# EAGLE board ac-ac-conv v1.1 (EAGLE 7.3.0)
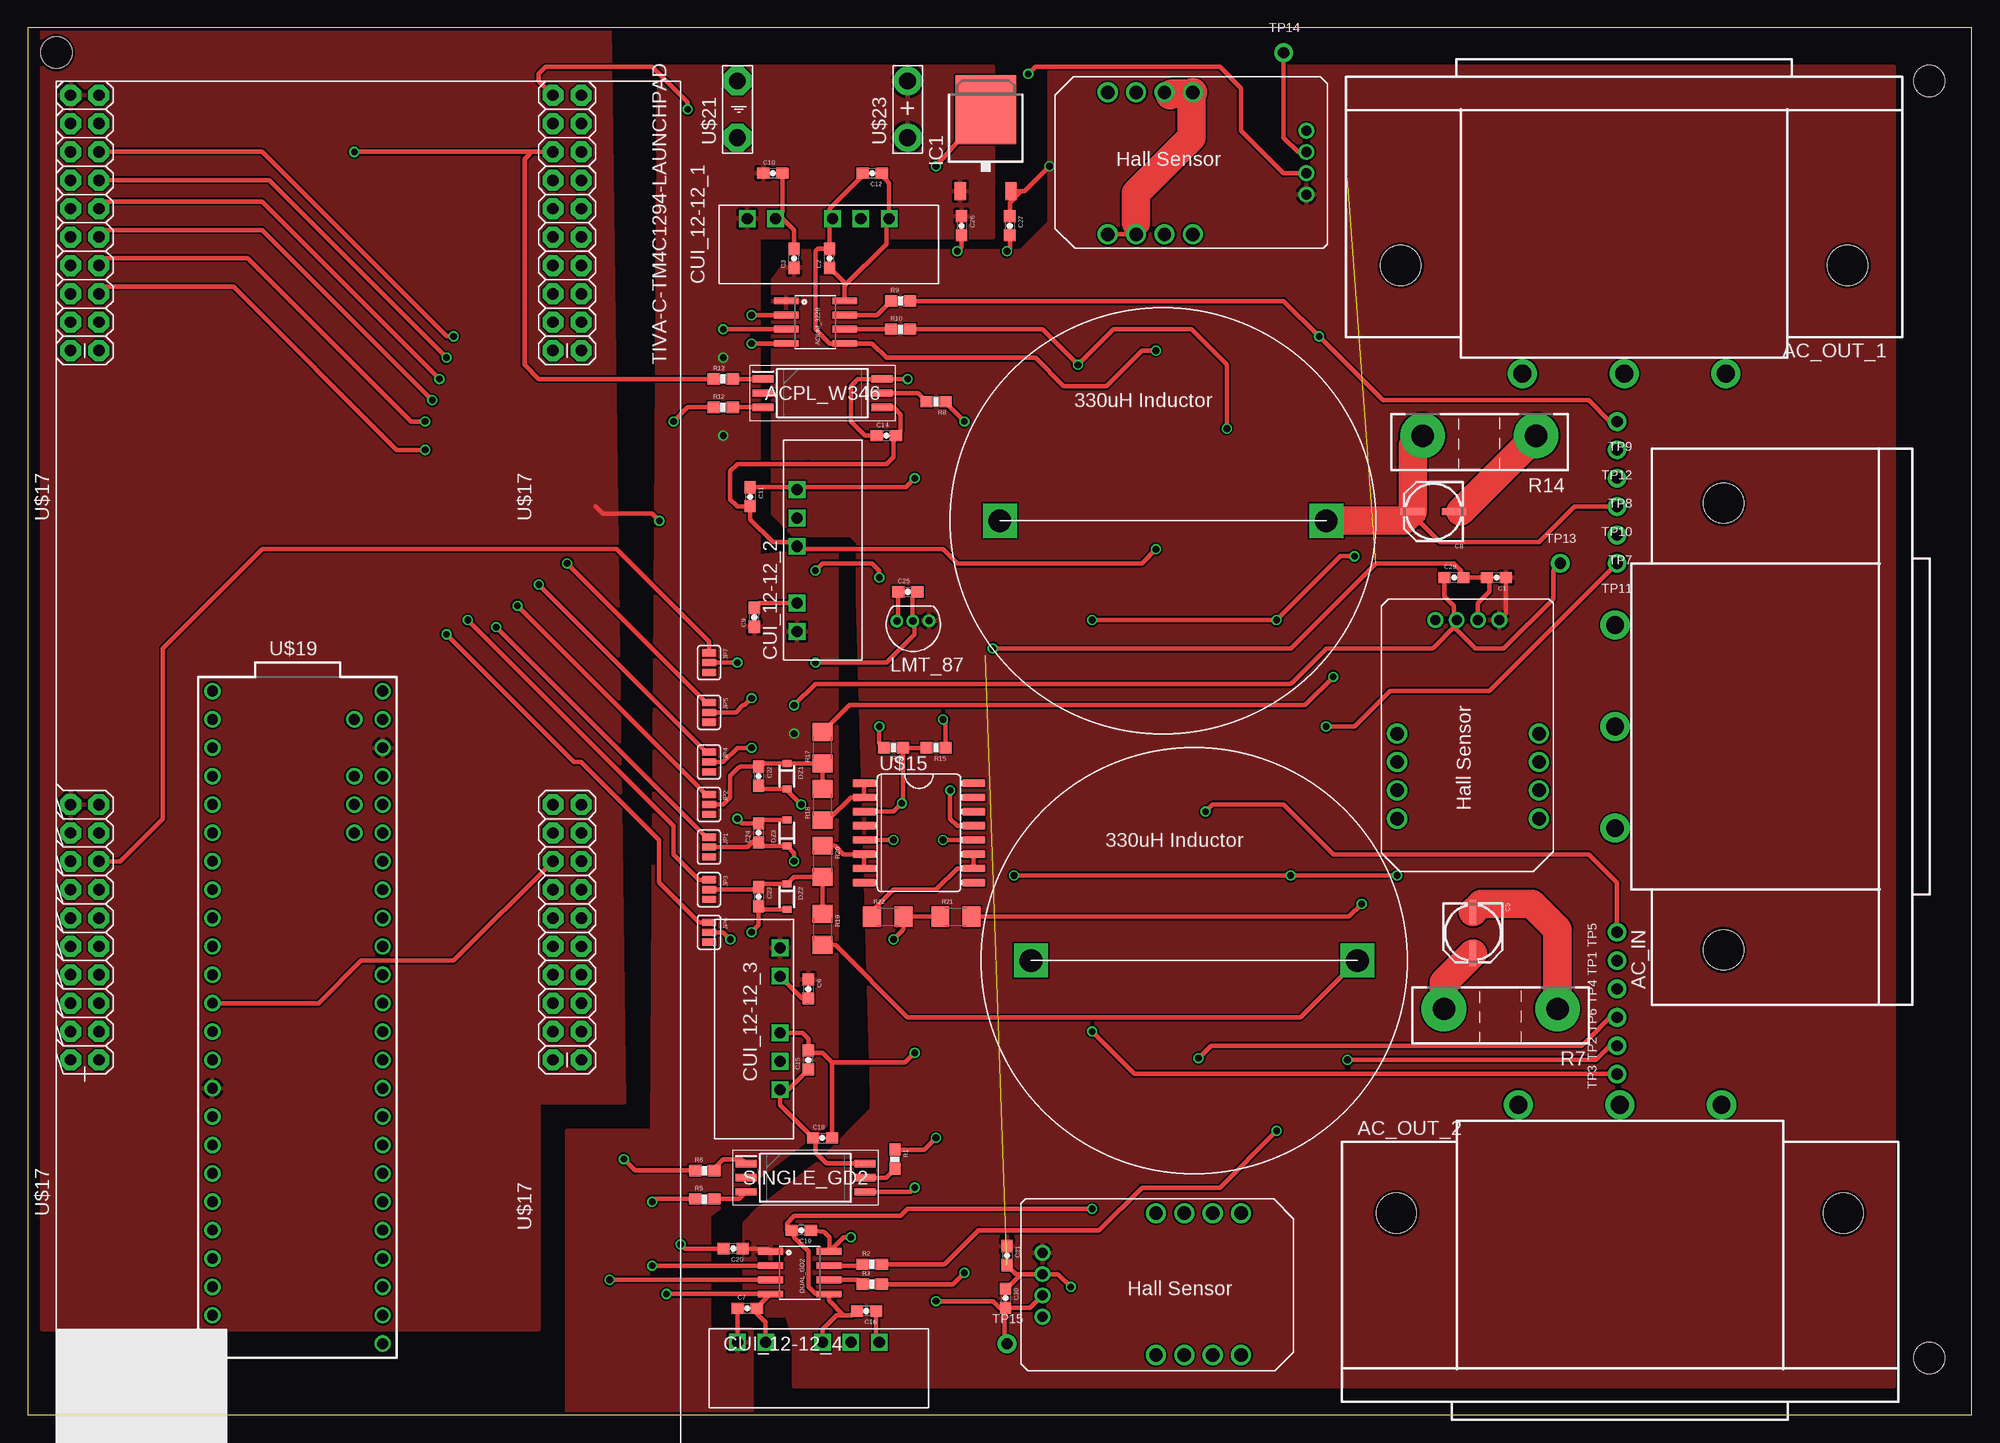
[diagram p0: board, top side]
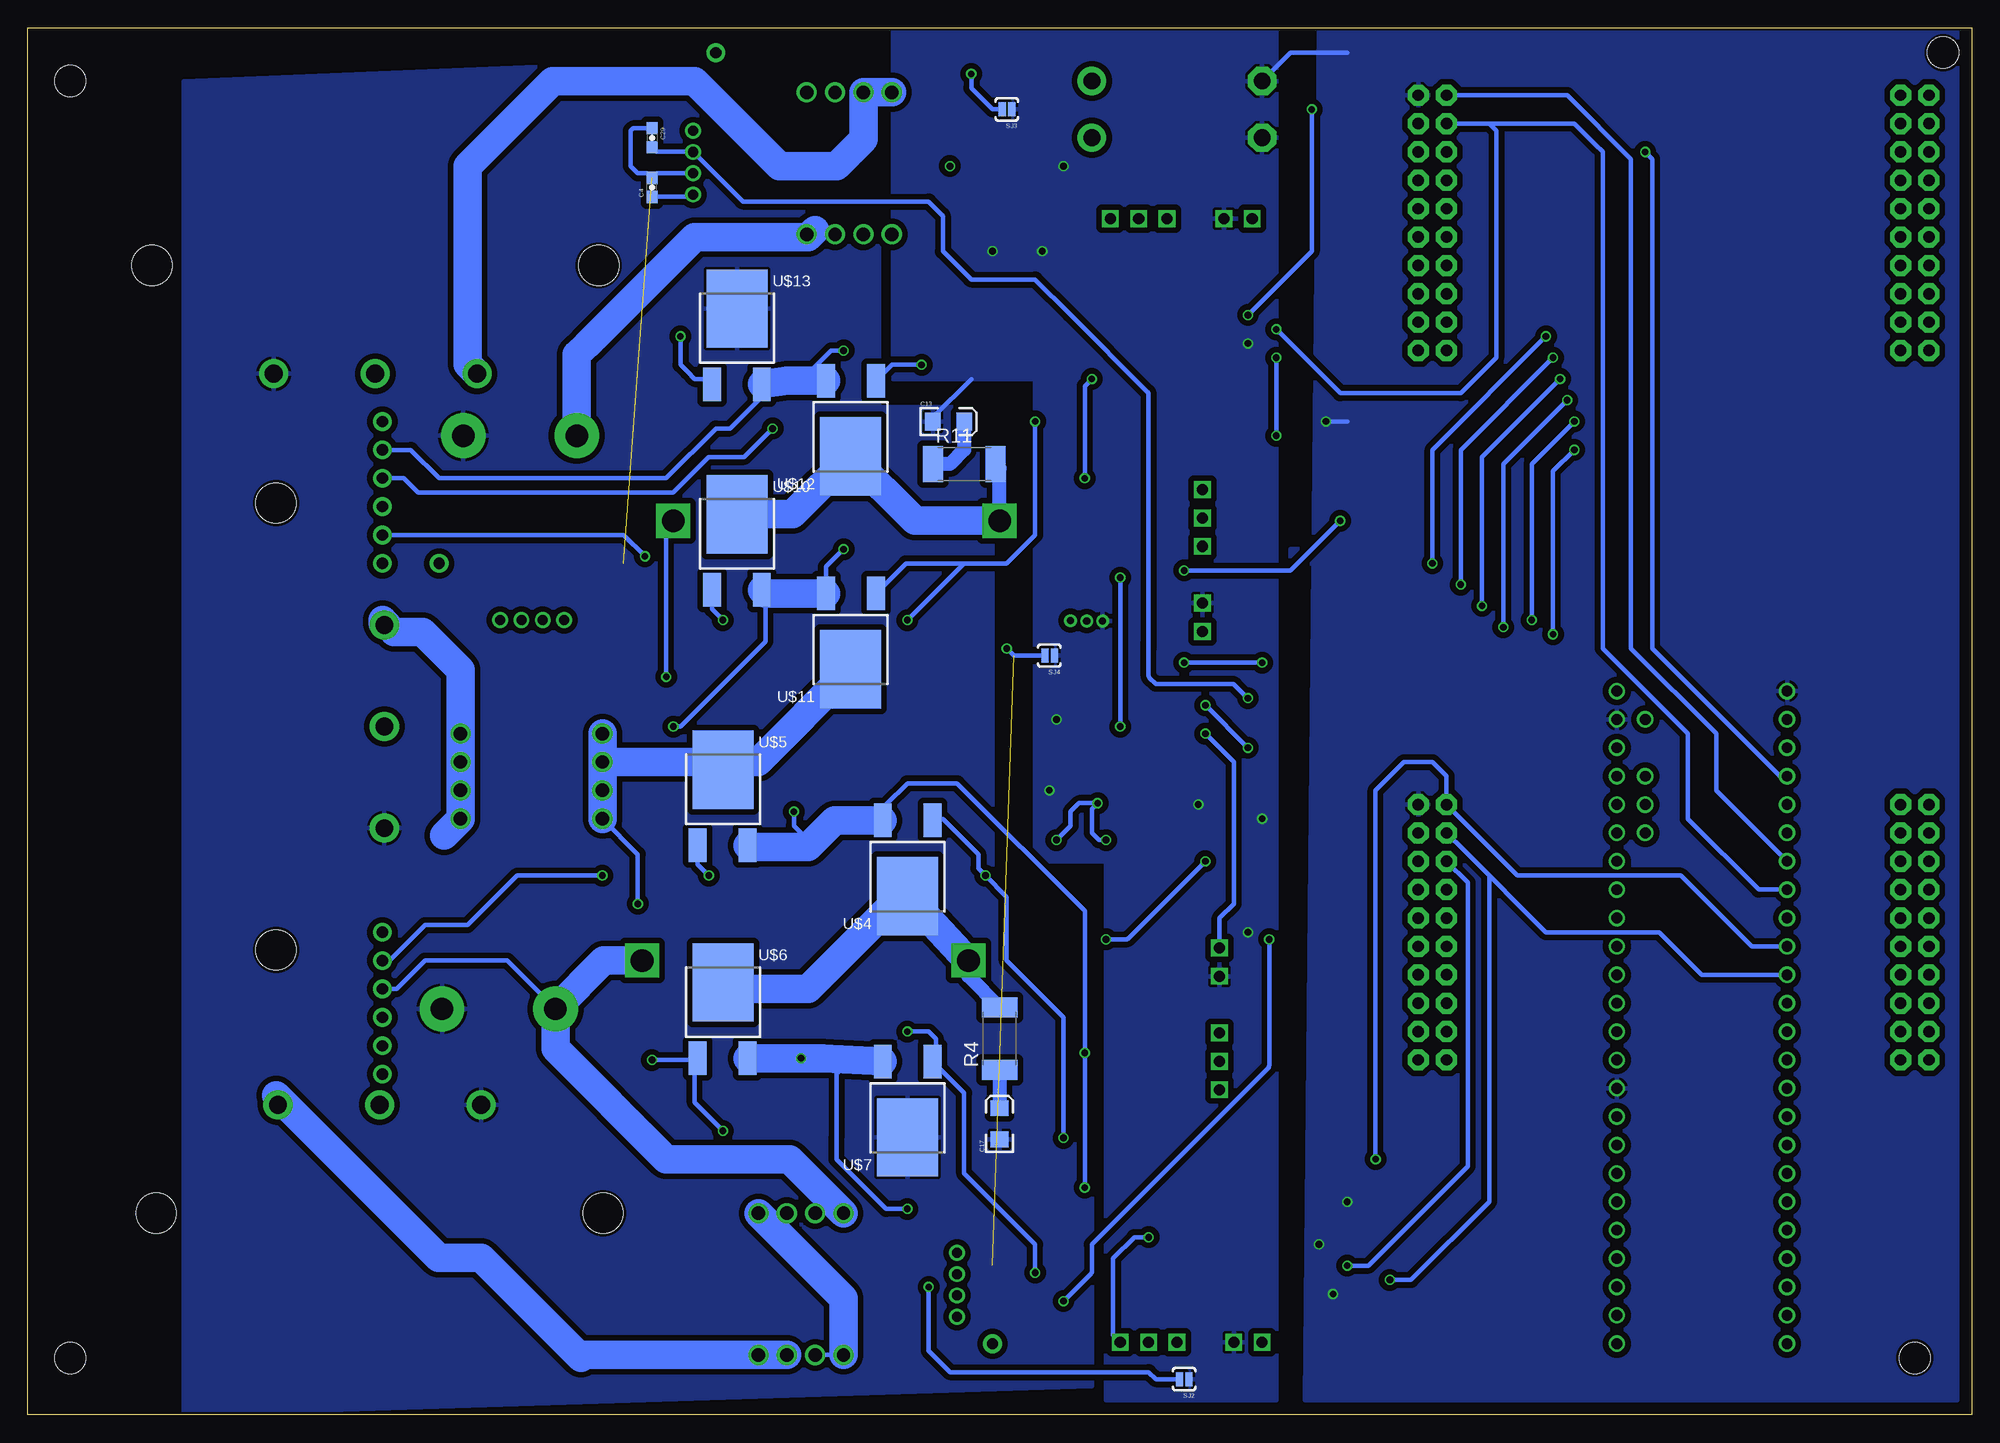
[diagram p1: board, bottom side, seen from below]

Size 173.97 x 124.13 mm. Coordinates in mm from the lower left corner, seen from the top.
Outline: 0,0 173.97,0 173.97,124.13 0,124.13 0,0
Copper layers (1*16): Top 0.035mm / dielectric 1.5mm / Bottom 0.035mm
Design rules "SeeedStudio_2layer_DRU_no_angle_20140221": minimum track width 6mil, minimum drill 12mil, track to track 6mil, track to pad 6mil, pad to pad 6mil, via to via 6mil, smd to smd 0mil, copper to edge 10mil, drill to drill 10mil, minimum pad ring 10mil, minimum via ring 6mil, stop-mask expansion 2mil, vias tented up to drill 100mil, thermal gap 10mil
Net classes: 1 Power: clearance 0.508 mm
Holes 2.8 mm at 170.18,119.38 170.18,5.08 2.54,121.92 5.08,5.08

## Footprints (pad centres in the part's own frame; a part is rotated, then mirrored left to right if it is on the bottom)
6ESRM-P = drill 1.6 pad 2.6: 1 -9.1,9.7; 2 0,9.7; 3 9.1,9.7 | hole 3.6: -20,0; 20,0
SSO-6 = smd 1.85 x 0.65: 1 -5.325,1.778; 2 -5.325,0.508; 3 -5.325,-0.762; 4 5.325,-0.762; 5 5.325,0.508; 6 5.325,1.778
SO08 = smd 0.61 x 2.21: 1 -1.905,-2.616; 2 -0.635,-2.616; 3 0.635,-2.616; 4 1.905,-2.616; 5 1.905,2.616; 6 0.635,2.616; 7 -0.635,2.616; 8 -1.905,2.616
0603-CAP = smd 1.1 x 1: 1 -0.85,0; 2 0.85,0
PANASONIC_C = smd 2.2 x 0.65: + 1.9,-0.2; - -1.8,-0.2
EIA3216 = smd 1.4 x 1.6: A 1.4,0; C -1.4,0
CUI_PDM2 = drill 0.991 square: 1 2.54,5.842; 2 5.08,5.842; 4 10.16,5.842; 5 12.7,5.842; 6 15.24,5.842
SOD-323 = smd 0.63 x 0.83: 1 -1.15,0; 2 1.15,0
F03P_THRU_HOLE = drill 0.9: GND -7.62,2.159; VCC -7.62,4.064; VOUT -7.62,0.254; VREF -7.62,-1.651 | drill 1.2: IN2 2.54,7.62; IN3 5.08,7.62; IN4 7.62,7.62; IN5 10.16,7.62; OUT6 10.16,-5.08; OUT7 7.62,-5.08; OUT8 5.08,-5.08; OUT9 2.54,-5.08
TO252 = smd 1 x 1.6: 1 -2.28,-4.8; 2 2.28,-4.8 | smd 5.4 x 6.2: 3 0,2.5
SJ_3 = smd 0.635 x 1.27: 1 -0.889,0; 2 0,0; 3 0.889,0
BOUNRS_330UH = drill 2.032 square: P$1 14.605,0; P$2 -14.605,0
LMT87_TO = drill 0.635: GND 0.305,-1.346; OUT 1.727,-1.346; VDD 3.175,-1.321
0603-RES = smd 1.1 x 1: 1 -0.85,0; 2 0.85,0
R2512 = smd 1.8 x 3.2: 1 -2.8,0; 2 2.8,0
TO-247-2V = drill 2 pad 4: 1 -5.08,0; 2 5.08,0
1206 = smd 1.6 x 1.8: 1 -1.4,0; 2 1.4,0
SJ_2S-NOTRACE = smd 0.635 x 1.27: 1 -0.45,0; 2 0.4,0
1X01_ROUND = drill 1 pad 1.676: 1 0,0
DPAK = smd 1.6 x 2.997: 1 -2.261,-4.928; 3 2.21,-4.928 | smd 5.452 x 7: 4 0,1.853
SO16L = smd 0.66 x 2.032: 1 -4.445,-4.902; 2 -3.175,-4.902; 3 -1.905,-4.902; 4 -0.635,-4.902; 5 0.635,-4.902; 6 1.905,-4.902; 7 3.175,-4.902; 8 4.445,-4.902; 9 4.445,4.902; 10 3.175,4.902; 11 1.905,4.902; 12 0.635,4.902; 13 -0.635,4.902; 14 -1.905,4.902; 15 -3.175,4.902; 16 -4.445,4.902
TIVA-C-LP-BOOSTER-PACK = drill 1.016 pad 1.88 octagon: 1 36.83,52.07; 2 36.83,54.61; 3 39.37,52.07; 4 39.37,54.61; 5 41.91,52.07; 6 41.91,54.61; 7 44.45,52.07; 8 44.45,54.61; 9 46.99,52.07; 10 46.99,54.61; 11 49.53,52.07; 12 49.53,54.61; 13 52.07,52.07; 14 52.07,54.61; 15 54.61,52.07; 16 54.61,54.61; 17 57.15,52.07; 18 57.15,54.61; 19 59.69,52.07; 20 59.69,54.61; 21 36.83,8.89; 22 36.83,11.43; 23 39.37,8.89; 24 39.37,11.43; 25 41.91,8.89; 26 41.91,11.43; 27 44.45,8.89; 28 44.45,11.43; 29 46.99,8.89; 30 46.99,11.43; 31 49.53,8.89; 32 49.53,11.43; 33 52.07,8.89; 34 52.07,11.43; 35 54.61,8.89; 36 54.61,11.43; 37 57.15,8.89; 38 57.15,11.43; 39 59.69,8.89; 40 59.69,11.43; 41 100.33,8.89; 42 100.33,11.43; 43 102.87,8.89; 44 102.87,11.43; 45 105.41,8.89; 46 105.41,11.43; 47 107.95,8.89; 48 107.95,11.43; 49 110.49,8.89; 50 110.49,11.43; 51 113.03,8.89; 52 113.03,11.43; 53 115.57,8.89; 54 115.57,11.43; 55 118.11,8.89; 56 118.11,11.43; 57 120.65,8.89; 58 120.65,11.43; 59 123.19,8.89; 60 123.19,11.43; 61 100.33,52.07; 62 100.33,54.61; 63 102.87,52.07; 64 102.87,54.61; 65 105.41,52.07; 66 105.41,54.61; 67 107.95,52.07; 68 107.95,54.61; 69 110.49,52.07; 70 110.49,54.61; 71 113.03,52.07; 72 113.03,54.61; 73 115.57,52.07; 74 115.57,54.61; 75 118.11,52.07; 76 118.11,54.61; 77 120.65,52.07; 78 120.65,54.61; 79 123.19,52.07; 80 123.19,54.61
TEENSY_3.5_DIL+4 = drill 0.965: 0 -7.62,26.67; 1 -7.62,24.13; 2 -7.62,21.59; 3 -7.62,19.05; 3.3V 7.62,24.13; 3.3V3 -7.62,-6.35; 4 -7.62,16.51; 5 -7.62,13.97; 6 -7.62,11.43; 7 -7.62,8.89; 8 -7.62,6.35; 9 -7.62,3.81; 10 -7.62,1.27; 11 -7.62,-1.27; 12 -7.62,-3.81; 13 7.62,-3.81; 14/A0 7.62,-1.27; 15/A1 7.62,1.27; 16/A2 7.62,3.81; 17/A3 7.62,6.35; 18/A4 7.62,8.89; 19/A5 7.62,11.43; 20/A6 7.62,13.97; 21/A7 7.62,16.51; 22/A8 7.62,19.05; 23/A9 7.62,21.59; 24 -7.62,-8.89; 25 -7.62,-11.43; 26 -7.62,-13.97; 27 -7.62,-16.51; 28 -7.62,-19.05; 29 -7.62,-21.59; 30 -7.62,-24.13; 31/A12 -7.62,-26.67; 32/A13 -7.62,-29.21; 33/A14 7.62,-29.21; 34/A15 7.62,-26.67; 35/A16 7.62,-24.13; 36/A17 7.62,-21.59; 37/A18 7.62,-19.05; 38/A19 7.62,-16.51; 39/A20 7.62,-13.97; A10 5.08,19.05; A11 5.08,16.51; A21 7.62,-11.43; A22 7.62,-8.89; AGND 7.62,26.67; AREF 5.08,21.59; GND -7.62,29.21; GND1 7.62,-6.35; VIN 7.62,29.21; VUSB 5.08,26.67
SPADE-GROUND = drill 1.5 pad 2.54 octagon: P$1 0,-2.54; P$2 0,2.54
SPADE-POWER = drill 1.5 pad 2.54: P$1 0,-2.54; P$2 0,2.54

## Placement (x,y rotation side)
AC_IN  6ESRM-P  [6ESRM-P]  151.76,61.59 90 top
AC_OUT_1  6ESRM-P  [6ESRM-P]  142.88,102.87 180 top
AC_OUT_2  6ESRM-P  [6ESRM-P]  142.49,18.03 0 top
ACPL_W346  ACPL-W346-SSO6  [SSO-6]  71.12,90.93 0 top
ADUM_3220  ADUM3220  [SO08]  70.48,97.79 270 top
C1  0.1u  [0603-CAP]  131.44,74.93 180 top
C2  1u  [0603-CAP]  71.75,103.5 90 top
C3  0.1u  [0603-CAP]  68.58,103.5 90 top
C4  0.1u  [0603-CAP]  118.11,109.86 90 bottom
C5  10u  [PANASONIC_C]  129.54,43.18 270 top
C6  2.2u  [0603-CAP]  69.85,38.1 270 top
C7  2.2u  [0603-CAP]  64.39,9.53 0 top
C8  10u  [PANASONIC_C]  125.86,80.64 180 top
C9  2.2u  [0603-CAP]  65.02,71.37 90 top
C10  2.2u  [0603-CAP]  66.67,111.12 0 top
C11  2.2u  [0603-CAP]  64.64,82.17 270 top
C12  2.2u  [0603-CAP]  75.56,111.12 180 top
C13  10n  [EIA3216]  91.57,88.9 0 bottom
C14  1u  [0603-CAP]  76.83,87.63 0 top
C15  2.2u  [0603-CAP]  69.85,31.75 90 top
C16  2.2u  [0603-CAP]  75.06,9.27 180 top
C17  1n  [EIA3216]  87,26.04 90 bottom
C18  1u  [0603-CAP]  71.12,24.77 0 top
C19  1u  [0603-CAP]  69.22,16.51 180 top
C20  0.1u  [0603-CAP]  63.12,14.86 180 top
C21  0.1u  [0603-CAP]  87.63,14.22 270 top
C22  0.1u  [0603-CAP]  65.41,57.15 270 top
C23  0.1u  [0603-CAP]  65.41,46.35 270 top
C24  0.1u  [0603-CAP]  65.41,52.07 90 top
C25  0.1u  [0603-CAP]  78.74,73.66 0 top
C26  0.1u  [0603-CAP]  83.57,106.43 270 top
C27  0.1u  [0603-CAP]  87.88,106.43 270 top
C28  0.1u  [0603-CAP]  127.64,74.93 0 top
C29  0.1u  [0603-CAP]  118.11,114.3 270 bottom
C30  0.1u  [0603-CAP]  87.5,10.41 270 top
CUI_12-12_1  CUI-S12-S12  [CUI_PDM2]  61.85,101.22 0 top
CUI_12-12_2  CUI-S12-S12  [CUI_PDM2]  74.68,67.56 90 top
CUI_12-12_3  CUI-S12-S12  [CUI_PDM2]  61.47,44.32 270 top
CUI_12-12_4  CUI-S12-S12  [CUI_PDM2]  60.96,0.64 0 top
DUAL_GD2  ADUM3220  [SO08]  69.09,12.7 270 top
DZ1  DIODE-ZENER-BZT52  [SOD-323]  67.94,57.15 270 top
DZ2  DIODE-ZENER-BZT52  [SOD-323]  67.94,46.35 270 top
DZ3  DIODE-ZENER-BZT52  [SOD-323]  67.94,52.07 90 top
I_SENSE_1  F03PS05  [F03P_THRU_HOLE]  127.64,63.5 270 top
I_SENSE_2  F03PS05  [F03P_THRU_HOLE]  106.81,113.28 180 top
I_SENSE_3  F03PS05  [F03P_THRU_HOLE]  98.42,10.41 0 top
IC1  7805DT  [TO252]  85.72,114.3 0 top
JP1  JUMPER-3SMD  [SJ_3]  60.96,50.8 270 top
JP2  JUMPER-3SMD  [SJ_3]  60.96,54.61 270 top
JP3  JUMPER-3SMD  [SJ_3]  60.96,46.99 270 top
JP4  JUMPER-3SMD  [SJ_3]  60.96,58.42 270 top
JP5  JUMPER-3SMD  [SJ_3]  60.96,62.87 270 top
JP6  JUMPER-3SMD  [SJ_3]  60.96,43.18 270 top
JP7  JUMPER-3SMD  [SJ_3]  60.96,67.31 270 top
L1  L330UH  [BOUNRS_330UH]  104.39,40.64 180 top
L2  L330UH  [BOUNRS_330UH]  101.6,80.01 180 top
LMT_87  LMT87_PAC  [LMT87_TO]  77.47,72.39 0 top
R1  100  [0603-RES]  77.6,22.86 270 top
R2  [0603-RES]  75.56,13.46 0 top
R3  [0603-RES]  75.56,11.68 0 top
R4  10k  [R2512]  87,33.66 90 bottom
R5  100  [0603-RES]  60.58,19.3 0 top
R6  330  [0603-RES]  60.58,21.84 0 top
R7  50  [TO-247-2V]  131.83,36.32 180 top
R8  100  [0603-RES]  81.28,90.68 180 top
R9  100  [0603-RES]  78.11,99.69 0 top
R10  100  [0603-RES]  78.11,97.16 0 top
R11  100k  [R2512]  90.17,85.09 0 bottom
R12  100  [0603-RES]  62.23,90.17 0 top
R13  330  [0603-RES]  62.23,92.71 0 top
R14  50  [TO-247-2V]  129.92,87.63 180 top
R15  10k  [0603-RES]  81.28,59.69 180 top
R16  10k  [0603-RES]  77.47,59.69 180 top
R17  100k  [1206]  71.12,59.69 90 top
R18  1.2k  [1206]  71.12,54.61 90 top
R19  100k  [1206]  71.12,43.43 270 top
R20  1.2k  [1206]  71.12,49.53 270 top
R21  100k  [1206]  83.06,44.58 0 top
R22  1.2k  [1206]  76.96,44.58 0 top
SINGLE_GD2  ACPL-W346-SSO6  [SSO-6]  69.6,20.7 0 top
SJ2  SOLDERJUMPERNC2  [SJ_2S-NOTRACE]  70.48,3.17 180 bottom
SJ3  SOLDERJUMPERNC2  [SJ_2S-NOTRACE]  86.36,116.84 180 bottom
SJ4  SOLDERJUMPERNC2  [SJ_2S-NOTRACE]  82.55,67.94 180 bottom
TP1  [1X01_ROUND]  142.24,40.64 90 top
TP2  [1X01_ROUND]  142.24,33.02 90 top
TP3  [1X01_ROUND]  142.24,30.48 90 top
TP4  [1X01_ROUND]  142.24,38.1 90 top
TP5  [1X01_ROUND]  142.24,43.18 90 top
TP6  [1X01_ROUND]  142.24,35.56 90 top
TP7  [1X01_ROUND]  142.24,78.74 180 top
TP8  [1X01_ROUND]  142.24,83.82 180 top
TP9  [1X01_ROUND]  142.24,88.9 180 top
TP10  [1X01_ROUND]  142.24,81.28 180 top
TP11  [1X01_ROUND]  142.24,76.2 180 top
TP12  [1X01_ROUND]  142.24,86.36 180 top
TP13  [1X01_ROUND]  137.16,76.2 0 top
TP14  [1X01_ROUND]  112.39,121.92 0 top
TP15  [1X01_ROUND]  87.63,6.35 0 top
U$4  IPD60R280P  [DPAK]  95.25,48.26 180 bottom
U$5  IPD60R280P  [DPAK]  111.76,55.88 0 bottom
U$6  IPD60R280P  [DPAK]  111.76,36.83 0 bottom
U$7  IPD60R280P  [DPAK]  95.25,26.67 180 bottom
U$10  IPD60R280P  [DPAK]  110.49,78.74 0 bottom
U$11  IPD60R280P  [DPAK]  100.33,68.58 180 bottom
U$12  IPD60R280P  [DPAK]  100.33,87.63 180 bottom
U$13  IPD60R280P  [DPAK]  110.49,97.16 0 bottom
U$15  LT1014  [SO16L]  79.76,52.07 270 top
U$17  TM4C1294_SHIELD  [TIVA-C-LP-BOOSTER-PACK]  58.42,-5.08 90 top
U$19  TEENSY_3.5_DIL+4  [TEENSY_3.5_DIL+4]  24.13,35.56 0 top
U$21  SPADE-GROUND  [SPADE-GROUND]  63.5,116.84 0 top
U$23  SPADE-POWER  [SPADE-POWER]  78.74,116.84 0 top

## Library data of the parts
AC_IN AC_OUT_1 AC_OUT_2 = con-tycoelectronics; MF: TYCO ELECTRONICS; MPN: 6ESRM-P; OC_FARNELL: unknown; OC_NEWARK: 87F1821
ACPL_W346 ADUM_3220 CUI_12-12_1-CUI_12-12_4 DUAL_GD2 I_SENSE_1-I_SENSE_3 L1 L2 SINGLE_GD2 U$4-U$7 U$10-U$13 U$17 = Francis-Project
C1-C30 DZ1-DZ3 JP1-JP7 R1-R3 R5 R6 R8-R10 R12 R13 R15-R22 SJ2-SJ4 = SparkFun
IC1 = linear
LMT_87 = nick
R4 R11 = SparkFun-Passives
R7 R14 = resistor-power; OC_FARNELL: unknown; OC_NEWARK: unknown
TP1-TP15 = microbuilder; BOM: EXCLUDE
U$15 = SparkFun-AnalogIC
U$19 = Teensy_3_and_LC_Series_Boards_v1.4
U$21 U$23 = Spade-terminals

## Nets
1V6: R15.2 R16.1 U$15.3 U$15.5 U$15.12
3V3: R16.2 U$17.20 U$17.80 U$19.3.3V U$19.3.3V3
5V: ADUM_3220.1 C1.1 C3.1 C4.1 C20.1 C21.1 C27.1 DUAL_GD2.1 I_SENSE_1.VCC I_SENSE_2.VCC I_SENSE_3.VCC IC1.2 LMT_87.VDD U$15.4
+12V: C6.1 C7.1 C9.1 C10.1 C26.1 CUI_12-12_1.1 CUI_12-12_2.1 CUI_12-12_3.1 CUI_12-12_4.1 IC1.1 U$23.P$1 U$23.P$2
+IN: U$15.14
-IN: U$15.15
AREF: U$19.AREF
DGND [Power]: C1.2 C4.2 C21.2 C28.2 C29.1 C30.1 I_SENSE_1.GND I_SENSE_2.GND I_SENSE_3.GND SJ2.2 SJ3.2 SJ4.2
GND [Power]: AC_IN.1 AC_OUT_1.1 AC_OUT_2.1 ADUM_3220.4 C3.2 C5.- C6.2 C7.2 C8.- C9.2 C10.2 C13.C C17.C C20.2 C22.2 C23.2 C24.2 C25.1 C26.2 C27.2 CUI_12-12_1.2 CUI_12-12_2.2 CUI_12-12_3.2 CUI_12-12_4.2 DUAL_GD2.4 DZ1.2 DZ2.2 DZ3.2 IC1.3 LMT_87.GND R5.1 R7.1 R12.1 R14.1 R15.1 SJ2.1 SJ3.1 SJ4.1 U$7.4 U$13.4 U$15.13 U$17.39 U$17.59 U$19.AGND U$19.GND U$19.GND1 U$21.P$1 U$21.P$2
HI_G1 [Power]: R8.1 TP7.1 U$10.1 U$11.1
HI_G2: R1.1 TP1.1 U$4.1 U$5.1
HI_PS1: ACPL_W346.6 C11.1 C14.1 CUI_12-12_2.6
HI_PS2: C15.1 C18.1 CUI_12-12_3.6 SINGLE_GD2.6
HI_S1: ACPL_W346.4 C11.2 C14.2 CUI_12-12_2.4 TP11.1 U$10.3 U$11.3
HI_S2 [Power]: C15.2 C18.2 CUI_12-12_3.4 SINGLE_GD2.4 TP5.1 U$4.3 U$5.3
I_APP1: C29.2 I_SENSE_2.VOUT JP5.2 TP14.1
I_APP1_TEENSY: JP5.3
I_APP1_TI: JP5.1 U$17.75
I_APP2: C30.2 I_SENSE_3.VOUT JP6.2 TP15.1
I_APP2_TEENSY: JP6.3
I_APP2_TI: JP6.1 U$17.65
I_MAIN: C28.1 I_SENSE_1.VOUT JP4.2 TP13.1
I_MAIN_TEENSY: JP4.3
I_MAIN_TI: JP4.1 U$17.73
LO_G1+: R9.2 TP9.1 U$13.1
LO_G1-: R10.2 TP8.1 U$12.1
LO_G2+: R3.2 TP3.1 U$7.1
LO_G2-: R2.2 TP2.1 U$6.1
LO_PS1: ADUM_3220.8 C2.1 C12.1 CUI_12-12_1.6
LO_PS2: C16.1 C19.1 CUI_12-12_4.6 DUAL_GD2.8
LO_S1 [Power]: ADUM_3220.5 C2.2 C12.2 CUI_12-12_1.4 TP12.1 U$12.3 U$13.3
LO_S2 [Power]: C16.2 C19.2 CUI_12-12_4.4 DUAL_GD2.5 TP6.1 U$6.3 U$7.3
N$1 [Power]: AC_IN.3 I_SENSE_1.IN2 I_SENSE_1.IN3 I_SENSE_1.IN4 I_SENSE_1.IN5
N$2 [Power]: I_SENSE_2.IN4 I_SENSE_2.IN5 I_SENSE_2.OUT8 I_SENSE_2.OUT9
N$3 [Power]: I_SENSE_3.IN4 I_SENSE_3.IN5 I_SENSE_3.OUT8 I_SENSE_3.OUT9
N$4 [Power]: AC_OUT_1.3 I_SENSE_2.OUT6 I_SENSE_2.OUT7
N$5 [Power]: L1.P$1 R4.2 U$4.4 U$6.4
N$6 [Power]: C17.A R4.1
N$7: R5.2 SINGLE_GD2.3
N$8: R6.2 SINGLE_GD2.1
N$9 [Power]: L2.P$1 R11.2 U$10.4 U$12.4
N$10 [Power]: AC_OUT_2.3 I_SENSE_3.OUT6 I_SENSE_3.OUT7
N$11 [Power]: C13.A R11.1
N$12: ACPL_W346.3 R12.2
N$13: ACPL_W346.1 R13.2
N$14 [Power]: ADUM_3220.7 R9.1
N$15: R18.1 U$15.1 U$15.2
N$16: U$19.14/A0
N$17: R22.1 U$15.10 U$15.11
N$18: U$19.15/A1
N$19: R20.1 U$15.6 U$15.7
N$20: U$19.16/A2
N$21: U$19.17/A3
N$23 [Power]: ADUM_3220.6 R10.1
N$24 [Power]: DUAL_GD2.7 R2.1
N$25: U$19.18/A4
N$26 [Power]: DUAL_GD2.6 R3.1
N$27: U$19.19/A5
N$41: U$19.20/A6
OUT: U$15.16
PWM_H1: R13.1 U$17.56 U$19.2
PWM_H2: R6.1 U$17.40 U$19.8
PWM_L1+: ADUM_3220.2 U$17.60 U$19.5
PWM_L1-: ADUM_3220.3 U$17.58 U$19.6
PWM_L2+: DUAL_GD2.3 U$17.38 U$19.9
PWM_L2-: DUAL_GD2.2 U$17.36 U$19.10
TEMP: C25.2 JP7.2 LMT_87.OUT
TEMP_TEENSY: JP7.3
TEMP_TI: JP7.1 U$17.15
V_APP1: C22.1 DZ1.1 JP2.2 R17.1 R18.2
V_APP1_TEENSY: JP2.3
V_APP1_TI: JP2.1 U$17.71
V_APP2: C23.1 DZ2.1 JP3.2 R19.1 R20.2
V_APP2_TEENSY: JP3.3
V_APP2_TI: JP3.1 U$17.67
V_MAIN: C24.1 DZ3.1 JP1.2 R21.1 R22.2
V_MAIN_TEENSY: JP1.3
V_MAIN_TI: JP1.1 U$17.69
VBUS [Power]: I_SENSE_1.OUT6 I_SENSE_1.OUT7 I_SENSE_1.OUT8 I_SENSE_1.OUT9 R21.2 U$5.4 U$11.4
VIN: U$19.VIN
VOUT1 [Power]: C8.+ I_SENSE_2.IN2 I_SENSE_2.IN3 L2.P$2 R14.2 R17.2 TP10.1
VOUT2 [Power]: C5.+ I_SENSE_3.IN2 I_SENSE_3.IN3 L1.P$2 R7.2 R19.2 TP4.1
VOUT_H1: R1.2 SINGLE_GD2.5
VOUT_H2: ACPL_W346.5 R8.2
VUSB: U$19.VUSB

## Tracks (layer width: path | path; a pad name or v marks a point on that pad's centre or on a via)
1V6  (via drill 0.6)
  Top 0.406: U$15.3 76.83,53.98 77.47,53.98 v78.23,54.73 arc45 78.32,54.96 R16.1 R15.2 | v81.92,51.44 U$15.12 | U$15.5 v77.47,51.44
  Bottom 0.406: v81.92,51.44 80.64,52.7 80.64,53.98 79.89,54.73 v78.23,54.73 78.74,54.22 78.74,52.07 78.11,51.44 v77.47,51.44
3V3  (via drill 0.6)
  Top 0.406: v76.2,61.59 76.2,60.11 R16.2 | v76.2,74.93 76.2,75.56 75.56,76.2 71.12,76.2 v70.48,75.56 | v56.52,80.01 55.88,80.64 51.44,80.64 50.8,81.28
  Bottom 0.406: v76.2,61.59 v76.2,74.93 | v70.48,75.56 60.96,75.56 v56.52,80.01
  pour Top: 1.27,124.46 52.07,124.46 53.34,27.94 45.72,27.94 45.72,7.62 1.27,7.62
5V  (via drill 0.6)
  Top 0.406: C20.1 66.22,14.86 DUAL_GD2.1 | IC1.2 88.9,109.5 | 88.9,109.5 89.18,109.5 v91.44,111.76 | C27.1 87.88,108.48 88.9,109.5 | C1.1 132.29,71.72 I_SENSE_1.VCC
  Bottom 0.406: C4.1 114.64,109 I_SENSE_2.VCC
  pour Top: 91.44,120.65 91.44,106.68 88.9,104.14 68.58,104.14 66.67,101.6 66.67,80.64 68.58,78.74 73.66,78.74 74.3,78.11 74.3,73.03 75.56,28.57 75.56,27.3 71.12,22.86 65.41,18.41 64.14,17.14 64.14,8.89 67.94,8.89 68.58,6.99 68.58,2.54 167,2.54 167,120.65
+12V  (via drill 0.6)
  Top 0.406: C7.1 63.54,6.52 CUI_12-12_4.1
  Bottom 0.406: CUI_12-12_3.1 67.31,44.45 66.04,45.72 66.04,58.42 v68.58,60.96 | v62.23,87.63 v62.23,94.61
  pour Top: 56.52,120.65 86.36,120.65 86.36,105.41 65.41,105.41 65.41,76.83 72.39,77.47 72.39,26.67 60.96,17.78 60.96,7.62 64.77,7.62 64.77,0 48.26,0 48.26,25.4 55.88,25.4
DGND  (via drill 0.6)  (2 unrouted)
  Top 0.406: 88.9,12.57 I_SENSE_3.GND 92.2,12.57 v93.34,11.43 | 88.9,12.57 88.56,12.57 arc-45 88.34,12.67 C21.2 | C30.1 arc45 87.65,11.33 88.9,12.57 | I_SENSE_2.GND 112.39,111.12 108.58,114.94 108.58,118.75 106.68,120.65 90.17,120.65 v89.53,120.02 | v86.36,68.58 113.03,68.58 120.65,76.2 127.64,76.2 128.27,75.56 128.27,75.14 C28.2 C1.2 130.81,74.72 130.81,73.66 129.79,72.64 I_SENSE_1.GND
  Bottom 0.406: v93.34,11.43 93.34,5.71 91.44,3.81 73.66,3.81 73.03,3.17 SJ2.2 | I_SENSE_2.GND 117.69,111.12 C4.2 118.53,111.12 119.38,111.12 120.02,111.76 120.02,114.94 119.8,115.15 C29.1 | v89.53,120.02 89.53,118.75 87.63,116.84 SJ3.2 | SJ4.2 85.72,67.94 v86.36,68.58
GND  (via drill 0.6)
  Top 0.406: CUI_12-12_2.2 65.44,72.64 C9.2 | C10.2 67.53,107.66 CUI_12-12_1.2 67.56,107.06 68.58,106.05 C3.2 | C6.2 69.3,37.25 CUI_12-12_3.2 | C20.2 58.8,14.86 v58.42,15.24 | R5.1 56.13,19.3 v55.88,19.05 | v57.15,10.79 DUAL_GD2.4 65.24,9.56 C7.2 65.24,9.06 66.04,8.26 CUI_12-12_4.2 | R15.1 82.13,62.02 v81.92,62.23 | U$15.13 83.19,52.7 82.55,53.34 v82.55,55.88 | C26.2 83.57,104.52 v83.19,104.14 | C27.2 87.88,104.39 v87.63,104.14 | ADUM_3220.4 v64.77,95.89 | DZ3.2 65.7,53.22 C24.2 63.92,52.92 v63.5,53.34 | C22.2 65.7,56 DZ1.2 67.94,55.88 v69.22,54.61 | DZ2.2 65.7,45.2 C23.2 65.41,43.81 v64.77,43.18 | C25.1 77.89,71.16 LMT_87.GND | 128.22,80.84 C8.- | IC1.3 v81.28,111.76 | R12.1 59.05,90.17 v57.78,88.9
  Top 2.54: R7.1 136.91,43.43 134.62,45.72 130.08,45.72 C5.- | 128.22,80.84 R14.1
  Bottom 0.406: C13.C 92.97,89.28 89.53,92.71 | v57.78,88.9 55.88,88.9 | U$21.P$2 60.96,121.92 55.88,121.92
  pour Bottom: 97.79,90.17 97.79,121.92 160.02,119.38 160.02,0 78.74,2.54 78.74,46.99 87.63,46.99 87.63,90.17
  pour Bottom: 62.23,124.46 96.52,124.46 96.52,92.71 83.82,92.71 83.82,49.53 77.47,49.53 77.47,1.27 62.23,1.27
  pour Bottom: 1.27,124.46 58.42,124.46 59.69,1.27 1.27,1.27
  pour Bottom: 60.96,77.47 57.15,77.47 57.15,76.2 60.96,76.2
HI_G1  (via drill 0.6)
  Top 0.406: R8.1 82.13,90.59 v83.82,88.9 | v95.25,71.12 v111.76,71.12 117.47,76.83 v118.75,76.83
  Bottom 0.406: v83.82,88.9 83.82,78.74 86.36,76.2 90.17,76.2 | 90.17,76.2 95.38,76.2 U$11.1 | U$10.1 112.75,73.03 112.75,72.11 v111.76,71.12 | v95.25,71.12 90.17,76.2 | TP7.1 120.65,78.74 v118.75,76.83
HI_G2  (via drill 0.6)
  Top 0.406: v88.27,48.26 v113.03,48.26 v122.56,48.26 | R1.1 80.22,23.71 v81.28,24.77
  Bottom 0.406: v81.28,24.77 81.28,35.56 83.82,38.1 86.36,40.64 86.36,46.35 v88.27,48.26 88.9,48.9 88.9,50.16 92.08,53.34 92.84,53.34 U$4.1 | U$5.1 114.02,49.25 v113.03,48.26 | TP1.1 141.6,40.64 138.43,43.81 134.62,43.81 130.18,48.26 v122.56,48.26
HI_PS1  (via drill 0.6)
  Top 0.406: C11.1 68.62,83.02 | 68.62,83.02 CUI_12-12_2.6 | C14.1 74.93,87.63 73.66,88.9 73.66,92.08 74.3,92.71 ACPL_W346.6 v78.74,92.71 | 68.62,83.02 78.57,83.02 v79.38,83.82
  Bottom 0.406: v79.38,83.82 79.38,92.08 v78.74,92.71
HI_PS2
  Top 0.406: C18.1 67.31,27.73 CUI_12-12_3.6 68.03,29.08 C15.1 | 70.48,24.55 C18.1 | SINGLE_GD2.6 71.5,22.48 70.48,23.5 70.48,24.55 | 70.48,24.55 C18.1
HI_S1  (via drill 0.6)
  Top 0.406: v100.97,77.47 99.69,76.2 83.19,76.2 81.92,77.47 69.09,77.47 CUI_12-12_2.4 68.45,78.11 66.67,78.11 64.64,80.14 C11.2 64.6,81.28 63.63,81.28 arc-45 63.41,81.37 62.87,81.92 62.87,84.45 63.5,85.09 69.85,85.09 76.83,85.09 77.47,85.72 77.47,87.42 C14.2 78.11,88.05 78.11,89.53 77.47,90.17 ACPL_W346.4 | TP11.1 130.81,64.77 121.92,64.77 118.75,61.59 v116.2,61.59
  Bottom 0.406: U$11.3 102.54,75.89 v100.97,77.47 | v116.2,61.59 115.57,61.59 112.39,64.77 107.95,69.22 107.95,73.48 U$10.3
  Bottom 2.54: U$11.3 107.97,73.51 U$10.3
HI_S2  (via drill 0.6)
  Top 0.406: CUI_12-12_3.4 69.34,34.16 69.85,33.66 C15.2 70.06,32.38 71.12,32.38 71.97,31.54 | C18.2 71.97,31.54 | 71.97,31.54 78.53,31.54 v79.38,32.38 | SINGLE_GD2.4 78.99,19.94 v79.38,20.32 | TP5.1 142.24,47.62 139.7,50.16 116.84,50.16 112.39,54.61 106.05,54.61 v105.41,53.98
  Bottom 0.406: U$4.3 97.16,53.49 97.16,54.61 95.25,56.52 90.81,56.52 79.38,45.09 v79.38,32.38 v79.38,20.32 | v105.41,53.98 105.41,52.7 103.82,51.12
  Bottom 2.54: U$4.3 101.75,53.19 103.82,51.12 104.14,50.8 109.22,50.8 109.37,50.95 U$5.3
I_APP1  (via drill 0.6)
  Top 0.406: v64.77,64.14 64.23,63.59 arc-45 64,63.5 63.37,62.87 JP5.2 | I_SENSE_2.VOUT 113.67,113.03 112.39,114.3 TP14.1
  Bottom 0.406: 73.66,69.22 73.66,91.31 arc-45 73.75,91.53 80.72,98.5 83.82,101.6 89.43,101.6 arc45 89.61,101.67 92.08,104.14 92.08,107.21 arc-45 92.15,107.39 93.34,108.58 109.88,108.58 arc45 110.06,108.66 I_SENSE_2.VOUT 117.69,113.03 C29.2 | 73.66,69.22 73.66,68.58 | 73.66,69.22 73.66,66.17 arc-45 73.57,65.95 73.03,65.41 66.19,65.41 arc45 65.96,65.31 64.8,64.15 arc-45 v64.77,64.14
I_APP1_TI  (via drill 0.6)
  Top 0.406: JP5.1 60.71,63.75 v48.26,76.2 | v38.1,96.52 37.47,96.52 20.95,113.03 U$17.75
  Bottom 0.406: v48.26,76.2 48.26,86.36 v38.1,96.52
I_APP2  (via drill 0.6)
  Top 0.406: v81.28,10.16 86.23,10.16 arc-45 86.45,10.07 87,9.53 87.41,9.53 | 87.41,9.53 arc45 C30.2 89.57,9.56 arc45 89.79,9.66 I_SENSE_3.VOUT | JP6.2 62.23,43.18 v62.87,42.55 | 87.41,9.53 87.41,6.57 TP15.1
  Bottom 0.406: v81.28,10.16 78.83,12.61 arc-45 78.74,12.83 78.74,15.24 62.97,31.01 arc-45 62.88,31.23 62.87,31.25 v62.87,42.55
I_APP2_TI  (via drill 0.6)
  Top 0.406: JP6.1 60.07,44.07 56.52,47.62 56.52,51.44 49.53,58.42 48.9,58.42 v37.47,69.85 | v35.56,86.36 33.02,86.36 18.41,100.97 6.99,100.97 U$17.65
  Bottom 0.406: v37.47,69.85 37.47,84.45 v35.56,86.36
I_MAIN  (via drill 0.6)
  Top 0.406: 127.64,70.48 125.82,68.67 arc-45 125.6,68.58 116.2,68.58 113.12,65.5 arc-45 112.9,65.41 70.48,65.41 v68.58,63.5 | 127.64,70.48 127.64,70.73 arc-45 127.73,70.96 I_SENSE_1.VOUT 127.64,71.37 127.64,72.39 | JP4.2 62.23,58.42 63.5,59.69 v64.77,59.69 | C28.1 126.78,73.24 127.64,72.39 | 127.64,72.39 127.64,70.48 | 127.64,70.48 129.54,68.58 132.08,68.58 136.53,73.03 136.53,75.56 TP13.1
  Bottom 0.406: v64.77,59.69 v68.58,63.5
I_MAIN_TI  (via drill 0.6)
  Top 0.406: JP4.1 60.71,59.31 v45.72,74.3 | v37.47,94.61 21.59,110.49 U$17.73
  Bottom 0.406: v45.72,74.3 45.72,86.36 v37.47,94.61
LO_G1+  (via drill 0.6)
  Top 0.406: R9.2 112.39,99.69 v115.57,96.52 121.28,90.81 139.7,90.81 141.6,88.9 TP9.1
  Bottom 0.406: v115.57,96.52 115.57,93.98 114.94,93.34 114.3,92.71 113.23,92.71 U$13.1
LO_G1-  (via drill 0.6)
  Top 0.406: R10.2 90.81,97.16 v93.98,93.98 97.16,97.16 104.14,97.16 107.31,93.98 v107.31,88.27
  Bottom 0.406: v93.98,93.98 96.65,93.98 U$12.1 | TP8.1 140.34,83.82 139.06,82.55 116.2,82.55 113.03,85.72 109.86,85.72 v107.31,88.27
LO_G2+  (via drill 0.6)
  Top 0.406: R3.2 82.8,11.68 v83.82,12.7 | TP3.1 99.06,30.48 v95.25,34.29
  Bottom 0.406: v83.82,12.7 83.82,15.24 90.17,21.59 90.17,28.78 U$7.1 92.71,31.88 92.71,33.66 93.34,34.29 v95.25,34.29
LO_G2-  (via drill 0.6)
  Top 0.406: R2.2 82.04,13.46 83.82,15.24 85.09,16.51 95.89,16.51 99.69,20.32 106.68,20.32 v111.76,25.4 | TP2.1 141.6,33.02 140.34,31.75 v118.11,31.75
  Bottom 0.406: v118.11,31.75 114.17,31.75 U$6.1 114.3,31.62 114.3,27.94 v111.76,25.4
LO_PS1
  Top 0.406: ADUM_3220.8 73.1,101.04 | 73.1,101.04 76.83,104.78 76.83,106.81 CUI_12-12_1.6 77.09,110.24 76.83,110.49 76.42,110.91 C12.1 | 73.1,101.04 73.1,101.31 C2.1
LO_PS2  (via drill 0.6)
  Top 0.406: C16.1 75.91,6.77 CUI_12-12_4.6 | C19.1 71.25,16.38 71.75,15.88 71.75,14.66 | 71.75,14.66 DUAL_GD2.8 | 71.75,14.66 71.81,14.66 73.03,15.88 v73.66,15.88
  Bottom 0.406: v73.66,15.88 74.93,15.88 76.83,13.97 76.83,7.11 CUI_12-12_4.6
LO_S1  (via drill 0.6)
  Top 0.406: C12.2 74.72,110.91 71.75,107.95 71.75,107.31 CUI_12-12_1.4 71.75,106.81 C2.2 70.7,104.36 70.48,104.14 70.48,97.16 71.75,95.89 ADUM_3220.5 | ADUM_3220.5 73.66,95.89 | 73.66,95.89 75.56,95.89 76.83,94.61 90.17,94.61 92.71,92.08 96.52,92.08 99.69,95.25 v100.97,95.25 | 73.66,95.89 ADUM_3220.5
  Bottom 0.406: v100.97,95.25 102.08,95.25 104.78,92.56 | TP12.1 139.7,86.36 137.16,83.82 116.84,83.82 112.39,88.27 111.12,88.27 107.95,91.44 107.95,91.9 U$13.3
  Bottom 2.54: U$12.3 104.78,92.56 106.05,92.56 U$13.3
LO_S2  (via drill 0.6)
  Top 0.406: CUI_12-12_4.4 71.12,7.62 72.39,8.89 73.03,8.89 | 73.03,8.89 73.83,8.89 C16.2 | 73.03,8.89 71.7,10.21 DUAL_GD2.5 70.48,10.79 69.85,11.43 69.85,14.61 69.22,15.24 68.58,15.88 68.58,16.3 C19.2 67.94,16.55 67.94,17.14 68.58,17.78 78.11,17.78 78.74,18.41 v95.25,18.41 | TP6.1 141.6,35.56 139.7,33.66 139.06,33.02 105.89,33.02 v104.78,31.9
  Bottom 0.406: U$7.3 100.48,31.6 101.6,30.48 101.6,24.77 101.6,22.86 97.16,18.41 v95.25,18.41 | v104.78,31.9 103.66,31.9 102.87,31.11
  Bottom 2.54: U$6.3 v104.78,31.9 102.84,31.9 U$7.3
N$1
  Bottom 2.54: 136.74,51.86 I_SENSE_1.IN5 I_SENSE_1.IN4 I_SENSE_1.IN3 135.25,60.33 | 135.25,60.33 I_SENSE_1.IN2 | 135.25,60.33 135.25,66.67 138.64,70.06 141.18,70.06 142.24,71.12 142.24,70.87 AC_IN.3
N$2
  Top 0.406: I_SENSE_2.IN5 98.17,105.66 99.19,106.68 I_SENSE_2.IN4 | I_SENSE_2.OUT8 102.23,118.36 102.36,118.24
  Top 2.54: 99.19,106.68 99.19,109.35 104.14,114.3 104.14,118.24 | 104.14,118.24 I_SENSE_2.OUT9 | 104.14,118.24 102.36,118.24 102.23,118.11
N$3
  Bottom 0.406: I_SENSE_3.IN4 106.43,18.03 106.68,17.78 106.93,18.03 I_SENSE_3.IN5 | I_SENSE_3.OUT8 I_SENSE_3.OUT9
  Bottom 2.54: I_SENSE_3.OUT9 100.97,10.41 I_SENSE_3.IN5
N$4
  Bottom 2.54: I_SENSE_2.OUT6 I_SENSE_2.OUT7 99.19,114.17 101.6,111.76 106.68,111.76 114.3,119.38 125.77,119.38 127,119.38 134.62,111.76 134.62,94.02 AC_OUT_1.3
N$5
  Bottom 0.406: U$6.4 111.76,38.1
  Bottom 1.27: L1.P$1 89.79,39.25 R4.2
  Bottom 2.54: L1.P$1 90.48,41.33 U$4.4 95.83,46.41 104.14,38.1 111.76,38.1
N$6
  Bottom 1.27: R4.1 C17.A
N$7
  Top 0.406: R5.2 63.64,19.3 SINGLE_GD2.3
N$8
  Top 0.406: R6.2 61.43,22.06 62.23,22.86 63.89,22.86 SINGLE_GD2.1
N$9
  Bottom 1.27: L2.P$1 87,84.72 R11.2
  Bottom 2.54: U$10.4 105.51,80.59 U$12.4 94.56,80.01 L2.P$1
N$10
  Bottom 2.54: I_SENSE_3.OUT7 I_SENSE_3.OUT6 124.21,5.33 124.46,5.08 133.39,14.01 137.2,14.01 151.76,28.57 151.59,28.4 AC_OUT_2.3
N$11
  Bottom 1.27: C13.A 90.17,86.36 91.44,85.09 R11.1
N$12
  Top 0.406: ACPL_W346.3 R12.2
N$13
  Top 0.406: ACPL_W346.1 R13.2
N$14
  Top 0.406: ADUM_3220.7 75.98,98.42 R9.1
N$15
  Top 0.406: U$15.1 U$15.2 73.66,55.24 71.72,53.3 arc-45 71.49,53.21 R18.1
N$17
  Top 0.406: R22.1 75.56,44.95 arc-45 75.66,45.17 77.47,46.99 81.15,46.99 arc45 81.37,47.08 83.19,48.9 U$15.10 U$15.11
N$19
  Top 0.406: U$15.7 74.85,49.53 U$15.6 74.41,50.16 74.31,50.07 arc45 74.09,50.16 73.03,50.16 72.35,50.84 arc45 72.13,50.93 R20.1
N$23
  Top 0.406: ADUM_3220.6 R10.1
N$24
  Top 0.406: DUAL_GD2.7 74.59,13.34 R2.1
N$26
  Top 0.406: DUAL_GD2.6 74.33,12.06 R3.1
PWM_H1  (via drill 0.6)
  Top 0.406: U$17.56 45.72,113.03 | 45.72,113.03 45.09,113.03 44.77,112.71 | 44.77,112.71 44.45,112.39 | v29.21,113.03 45.72,113.03 | R13.1 45.72,92.71 44.45,93.98 44.45,112.39 | 44.45,112.39 44.77,112.71
  Bottom 0.406: v29.21,113.03 28.57,112.39 28.57,68.58 27.3,67.31 17.14,57.15 U$19.2
PWM_H2  (via drill 0.6)
  Top 0.406: R6.1 54.36,21.84 v53.34,22.86
  Bottom 0.406: v53.34,22.86 53.34,55.88 50.8,58.42 48.26,58.42 46.99,57.15 U$17.40 40.64,48.26 26.04,48.26 19.68,41.91 U$19.8
PWM_L1+  (via drill 0.6)
  Top 0.406: U$17.60 45.72,119.38 45.72,120.02 46.35,120.65 55.88,120.65 59.05,117.47 v59.05,116.84 | v64.77,98.42 ADUM_3220.2
  Bottom 0.406: v59.05,116.84 59.05,104.14 v64.77,98.42 | U$17.60 36.2,118.11 30.48,112.39 30.48,68.58 22.86,60.96 22.86,55.88 U$19.5
PWM_L1-  (via drill 0.6)
  Top 0.406: v62.23,97.16 ADUM_3220.3
  Bottom 0.406: U$17.58 44.45,115.57 | 44.45,115.57 43.18,115.57 42.55,114.94 42.55,94.61 45.72,91.44 56.52,91.44 v62.23,97.16 | 33.02,113.03 33.66,113.67 | 33.66,113.67 35.56,115.57 44.45,115.57 | U$19.6 19.05,46.99 25.4,53.34 25.4,60.96 33.02,68.58 33.02,113.03 | 33.02,113.03 33.66,113.67
PWM_L2+  (via drill 0.6)
  Top 0.406: DUAL_GD2.3 v52.07,12.06
  Bottom 0.406: v52.07,12.06 50.16,12.06 43.18,19.05 43.18,48.26 45.4,50.48 | 45.4,50.48 U$17.38 | U$19.9 24.13,39.37 27.94,43.18 38.1,43.18 45.4,50.48
PWM_L2-  (via drill 0.6)
  Top 0.406: DUAL_GD2.2 v55.88,13.34 | U$19.10 26.04,36.83 29.84,40.64 38.1,40.64 U$17.36
  Bottom 0.406: v55.88,13.34 53.98,13.34 45.09,22.23 45.09,47.62 U$17.36
TEMP  (via drill 0.6)
  Top 0.406: C25.2 79.29,73.36 arc45 79.2,73.14 LMT_87.OUT 79.28,70.96 arc-45 79.38,70.73 79.38,69.85 77.47,67.94 | 76.83,67.31 77.47,67.94 | JP7.2 v63.5,67.31 | v70.48,67.31 76.83,67.31 | 76.83,67.31 77.47,67.94
  Bottom 0.406: v63.5,67.31 v70.48,67.31
TEMP_TI
  Top 0.406: JP7.1 60.96,69.22 52.7,77.47 20.95,77.47 12.06,68.58 12.06,53.34 8.26,49.53 U$17.15
V_APP1
  Top 0.406: R18.2 R17.1 67.97,58.29 arc-45 DZ1.1 65.84,58.3 arc45 65.61,58.21 C22.1 63.85,58 arc45 63.62,57.91 62.87,57.15 62.87,55.92 62.87,55.24 62.23,54.61 JP2.2
V_APP1_TI  (via drill 0.6)
  Top 0.406: JP2.1 60.71,55.5 45.09,71.12 44.45,71.75 v43.81,72.39 | v36.83,92.71 20.95,108.58 6.99,108.58 U$17.71
  Bottom 0.406: v43.81,72.39 43.81,85.72 v36.83,92.71
V_APP2
  Top 0.406: JP3.2 65.19,46.99 C23.1 65.61,47.41 arc-45 65.84,47.51 DZ2.1 68.48,48.04 arc-45 68.7,48.13 R20.2 R19.1
V_APP2_TI  (via drill 0.6)
  Top 0.406: JP3.1 60.07,47.88 57.78,50.16 57.78,52.7 v39.37,71.12 | v35.56,88.9 34.29,88.9 19.68,103.5 6.99,103.5 U$17.67
  Bottom 0.406: v39.37,71.12 39.37,85.09 v35.56,88.9
V_MAIN  (via drill 0.6)
  Top 0.406: R21.1 R22.2 78.36,43.57 arc-45 78.27,43.34 v77.47,42.55 | v68.58,49.53 68.58,50.15 arc45 68.49,50.38 DZ3.1 65.84,50.92 arc-45 65.61,51.01 C24.1 65.13,51.22 arc-45 64.91,51.31 64.39,50.8 JP1.2
  Bottom 0.406: v77.47,42.55 75.7,42.55 arc-45 75.47,42.64 v68.58,49.53
V_MAIN_TI  (via drill 0.6)
  Top 0.406: JP1.1 60.71,51.69 v41.91,70.48 | v36.2,90.81 20.95,106.05 6.99,106.05 U$17.69
  Bottom 0.406: v41.91,70.48 41.91,85.09 v36.2,90.81
VBUS  (via drill 0.6)
  Top 0.406: R21.2 118.24,44.58 v119.38,45.72
  Bottom 0.406: v119.38,45.72 119.38,50.16 I_SENSE_1.OUT6 | 111.76,58.42 U$5.4
  Bottom 2.54: I_SENSE_1.OUT9 I_SENSE_1.OUT8 | I_SENSE_1.OUT8 I_SENSE_1.OUT7 I_SENSE_1.OUT6 | I_SENSE_1.OUT8 111.76,58.42 108.64,58.42 U$11.4
VOUT1  (via drill 0.6)
  Top 0.406: R17.2 73.53,63.5 114.3,63.5 v116.84,66.04 | C8.+ 123.96,80.51 126.36,78.11 135.25,78.11 138.43,81.28 TP10.1
  Top 2.54: L2.P$2 123.12,80.01 C8.+ 123.96,86.75 R14.2
  Bottom 0.406: v116.84,66.04 116.84,78.74 116.84,79.38 L2.P$2 | I_SENSE_2.IN2 103.89,106.05 103.5,106.05 102.11,106.05 I_SENSE_2.IN3
  Bottom 2.54: 103.5,106.05 104.14,105.41 114.3,105.41 123.96,95.75 124.84,94.87 R14.2
VOUT2
  Top 0.406: R19.2 72.27,42.03 78.74,35.56 113.92,35.56 L1.P$2
  Top 2.54: R7.2 126.75,38.69 C5.+
  Bottom 0.406: I_SENSE_3.IN3 I_SENSE_3.IN2 | TP4.1 140.97,38.1 138.43,40.64 131.06,40.64 R7.2
  Bottom 2.54: L1.P$2 122.43,40.64 R7.2 126.75,32.77 116.84,22.86 105.79,22.86 I_SENSE_3.IN2
VOUT_H1
  Top 0.406: SINGLE_GD2.5 76.8,21.21 R1.2
VOUT_H2
  Top 0.406: ACPL_W346.5 79.67,91.44 R8.2

## Text on the board
tDocu: v_sense
bDocu: I_sense